# Altium PCB esp32WifiDeauther.PcbDoc
Units mm, origin at the board's own origin, x right, y up, seen from the top; angles counter-clockwise.
Board outline 65 x 38 mm, 2 copper layers (Top Layer, Bottom Layer); 14 components, 11 nets, 54 pads, 5 vias.
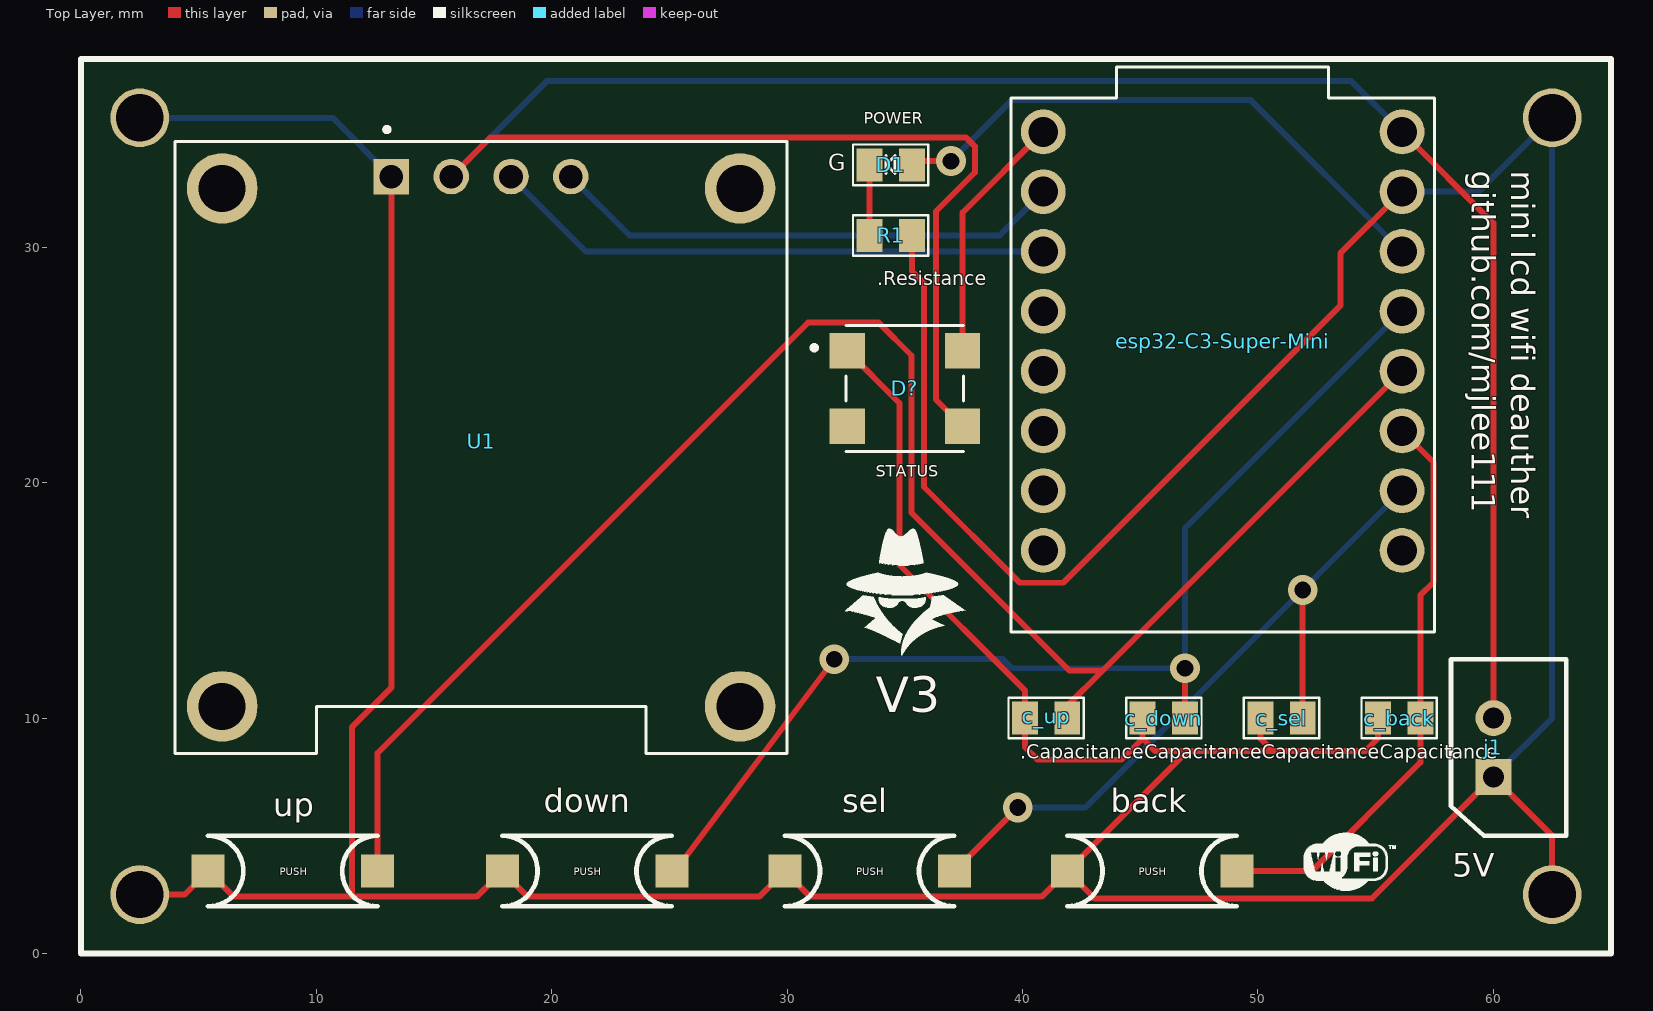
[diagram p0: Top Layer view]
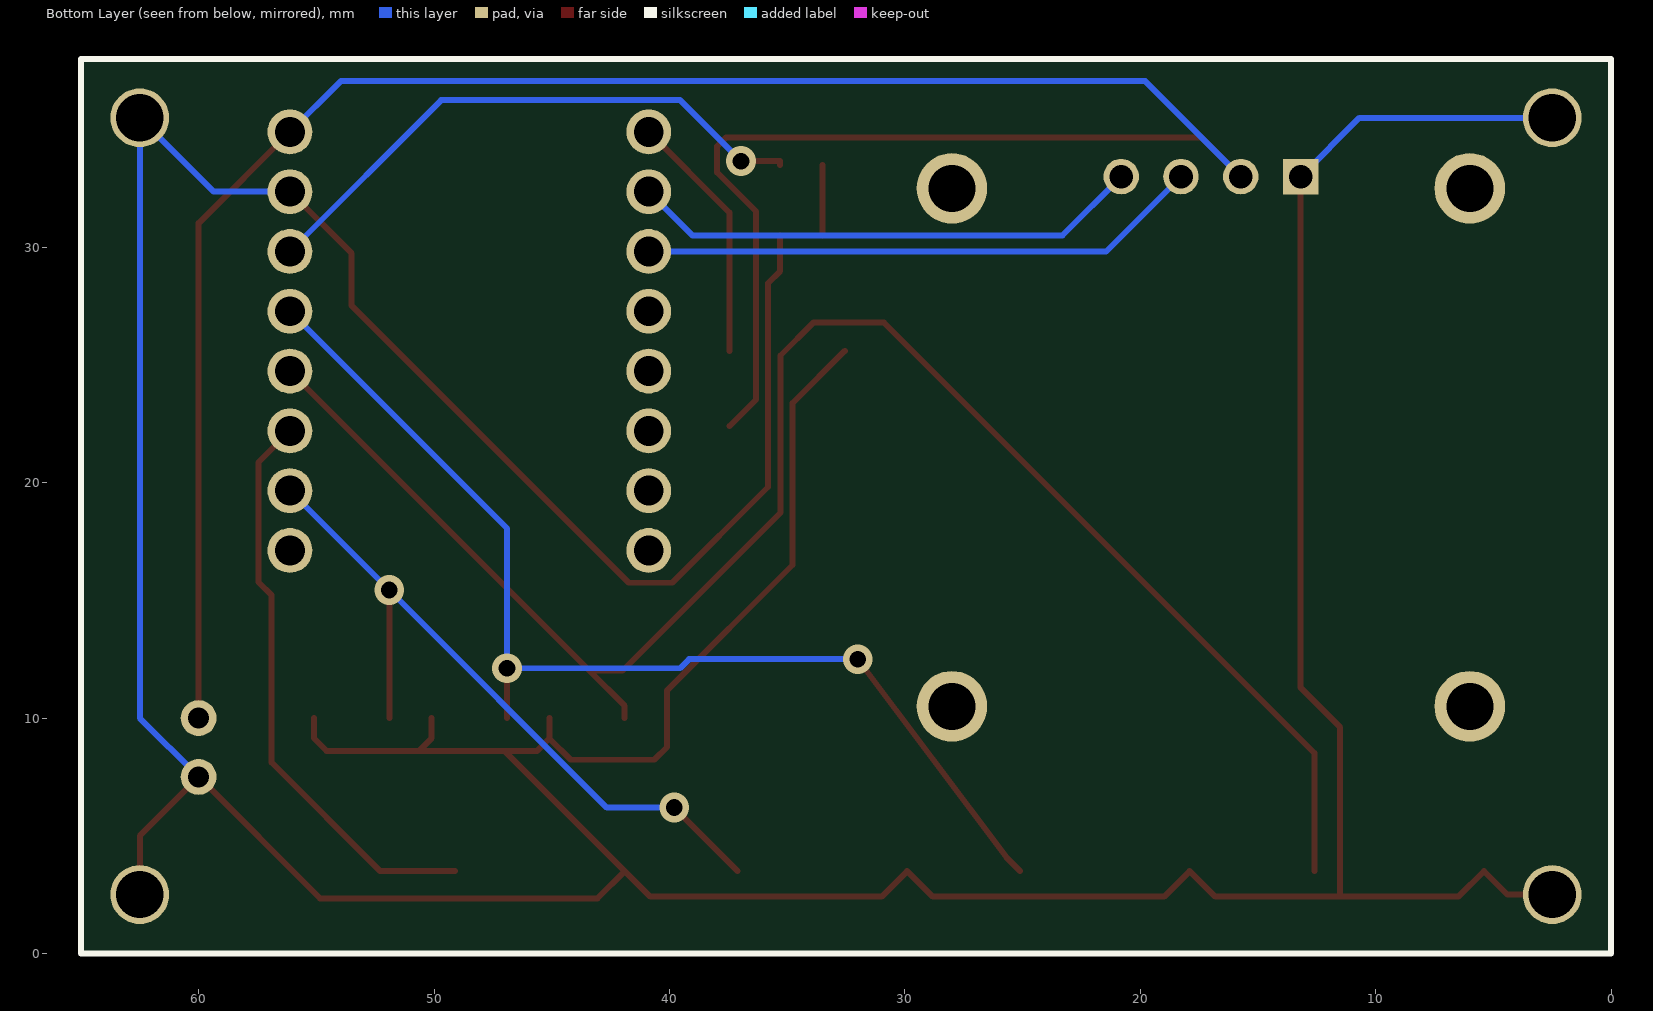
[diagram p1: Bottom Layer view, seen from below]
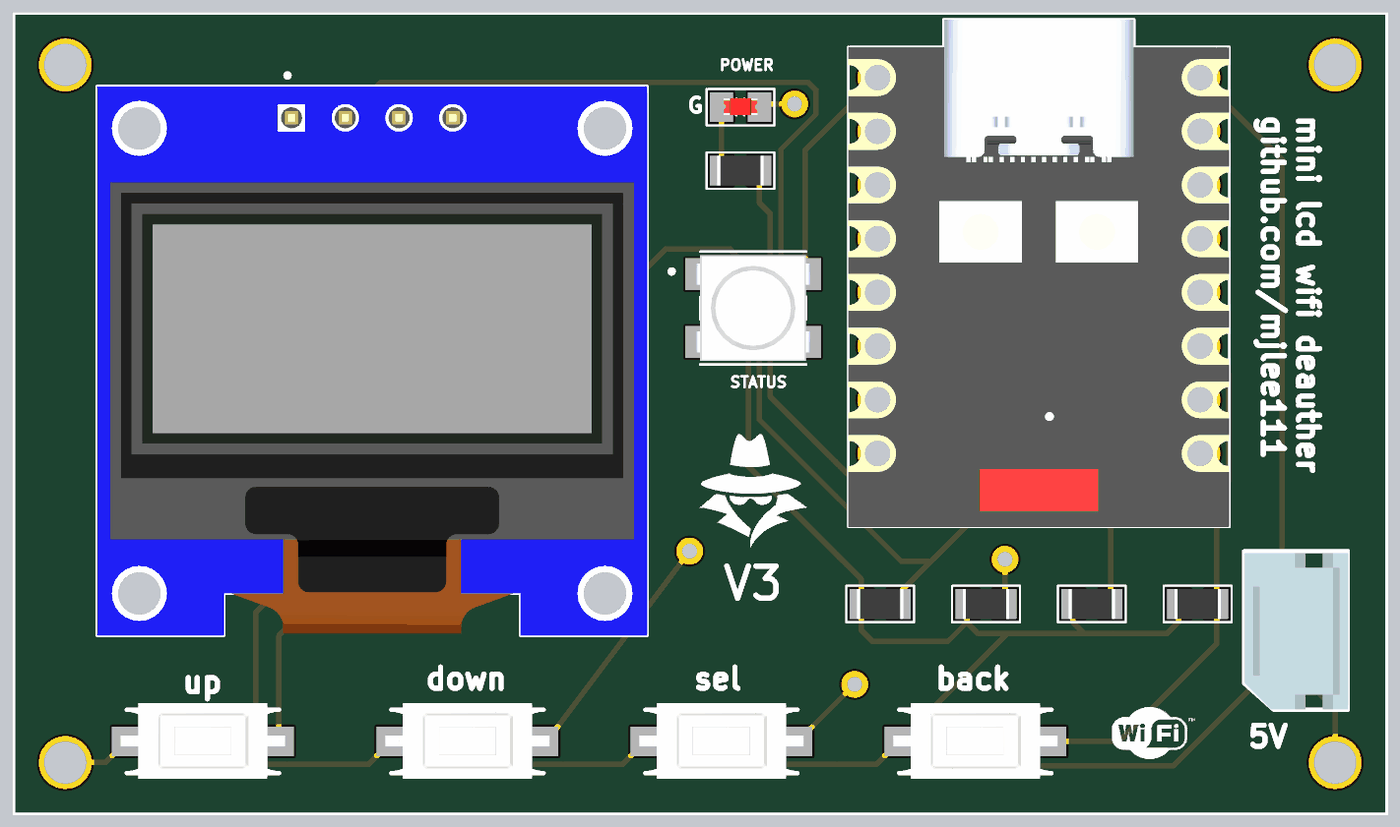
[diagram p2: 3D render of the assembled board from above, using the file's embedded part models]

## Layer stack, top to bottom
Top Solder: solder mask 0.0102, Solder Resist, Dk 3.5
Top Layer: signal copper 0.0356
Dielectric 1: dielectric 0.32, FR-4, Dk 4.8
Bottom Layer: signal copper 0.0356
Bottom Solder: solder mask 0.0102, Solder Resist, Dk 3.5

## Board outline
0,0 0,38 65,38 65,0

## Design rules (kind name [scope] priority, off if disabled: settings)
Clearance [All] p1: gap=0.254 ignorepadtopadclearanceinfootprint=FALSE
PolygonConnect [All] p1: connectstyle=Relief reliefconductorwidth=0.254 reliefentries=4 polygonreliefangle="90 Angle" airgapwidth=0.254
RoutingVias [All] p1: holewidth=0.711 width=1.27 viastyle="Through Hole" minholewidth=0.711 minwidth=1.27 maxholewidth=0.711 maxwidth=1.27
SolderMaskExpansion [All] p1: expansion=0.102 istentingtop=FALSE
SupplyNets "Schematic Supply Nets_9" [InNet('3.3V')] p1: voltage=0.000
SupplyNets "Schematic Supply Nets_8" [InNet('sk6812')] p2: voltage=0.000
SupplyNets "Schematic Supply Nets_7" [InNet('up')] p3: voltage=0.000
SupplyNets "Schematic Supply Nets_6" [InNet('SCL')] p4: voltage=0.000
SupplyNets "Schematic Supply Nets_5" [InNet('GND')] p5: voltage=0.000
SupplyNets "Schematic Supply Nets_4" [InNet('SDA')] p6: voltage=0.000
SupplyNets "Schematic Supply Nets_3" [InNet('5V')] p7: voltage=0.000
SupplyNets "Schematic Supply Nets_2" [InNet('back')] p8: voltage=0.000
SupplyNets "Schematic Supply Nets_1" [InNet('sel')] p9: voltage=0.000
SupplyNets "Schematic Supply Nets" [InNet('down')] p10: voltage=0.000
Width [All] p1: maxlimit=0.254 minlimit=0.254 preferedwidth=0.254
30 further rules are at their usual default settings.

## Components (designator, comment, footprint, x,y, rotation, side; value= is the part's Value field where it differs from the comment)
back "switch_tact" SMD_PUSH_SW 45.5,3.5 r0 top
c_back "non-polar_Capacitor" SMD_Capacitor 56,10 r0 top
c_down "non-polar_Capacitor" SMD_Capacitor 46,10 r0 top
c_sel "non-polar_Capacitor" SMD_Capacitor 51,10 r0 top
c_up "non-polar_Capacitor" SMD_Capacitor 41,10 r0 top
D1 "LED" SMD_LED 34.4,33.5 r0 top
D? "SK6812" LED_SK6812 35,24 r0 top
down "switch_tact" SMD_PUSH_SW 21.5,3.5 r0 top
esp32-C3-Super-Mini "ESP32-C3_SUPERMINI" MODULE_ESP32-C3_SUPERMINI 48.5,25 r0 top
j1 "Molex_2Pin" MOLEX_2PIN 60,10 r90 top
R1 "Resistor" SMD_Resistor 34.4,30.5 r0 top
sel "switch_tact" SMD_PUSH_SW 33.5,3.5 r0 top
U1 "DM-OLED096-636" MODULE_DM-OLED096-636 17,21.5 r0 top
up "switch_tact" SMD_PUSH_SW 9,3.5 r0 top

## Footprints (in the part's own frame and the unit in brackets; to place one, negate y for a bottom-side part, rotate by r counter-clockwise, add the part's x,y. Pads: shape width x height; smd on the part's side, far side on the other; paste and mask are expansions set on the pad)
LED_SK6812 [mm]
  rect 1.5x1.5 smd: 1(-2.45,1.6) 2(-2.45,-1.6) 3(2.45,-1.6) 4(2.45,1.6)
  silkscreen extent -3.95,-2.67 2.5,2.67, body extent -2.7,-2.5 2.7,2.5, height 1.6
MODULE_DM-OLED096-636 [mm]
  rect 1.508x1.508 / inner round 1.508 / far side rect 1.508x1.508 hole 1: 1(-3.81,11.5)
  round 1.508 hole 1: 2(-1.27,11.5) 3(1.27,11.5) 4(3.81,11.5)
  round 3 hole 2: S1(-11,11) S2(11,11) S3(11,-11) S4(-11,-11)
  silkscreen extent -13,-13 13,13.6, body extent -13,-13 13,13, height 5.66
MODULE_ESP32-C3_SUPERMINI [mm]
  round 1.905 hole 1.27: 0(7.62,-7.88) 1(7.62,-5.34) 2(7.62,-2.8) 3(7.62,-0.26) 3.3(7.62,4.82) 4(7.62,2.28) 5(-7.62,9.9) 5V(7.62,9.9) 6(-7.62,7.36) 7(-7.62,4.82) 8(-7.62,2.28) 9(-7.62,-0.26) 10(-7.62,-2.8) 20(-7.62,-5.34) 21(-7.62,-7.88) G(7.62,7.36)
  silkscreen extent -9,-11.35 9,12.65, body extent -9,-11.35 9,12.65, height 4.16
MOLEX_2PIN [mil]
  rect 60x60 / inner round 60 / far side round 60 hole 35: 1(-98.42,0)
  round 60 hole 35: 2(0,0)
  silkscreen extent -197,-122 98,71, body extent -196,-123 95,70, height 233
SMD_Capacitor [mm] "Chip Capacitor, 2-Leads, Body 2.00x1.25mm, IPC Medium Density"
  rect 1.1x1.4 smd: 1(-0.9,0) 2(0.9,0)
  silkscreen extent -1.6,-0.86 1.6,0.86, body extent -1.1,-0.7 1.1,0.7, height 0.65
SMD_LED [mm] "Chip Light Emitting Diode, 2-Leads, Body 1.60x0.80mm, IPC Medium Density"
  rect 1.1x1.4 smd: 1(-0.9,0) 2(0.9,0)
  silkscreen extent -1.6,-0.86 1.6,0.86, body extent -0.8,-0.38 0.8,0.42, height 0.81
SMD_PUSH_SW [mm]
  rect 1.4x1.4 smd: 1(-3.6,0) 2(3.6,0)
  silkscreen extent -3.6,-1.5 3.6,1.5, body extent -3.9,-1.78 3.9,1.82, height 2.46
SMD_Resistor [mm] "Chip Resistor, 2-Leads, Body 2.00x1.25mm, IPC Medium Density"
  rect 1.1x1.4 smd: 1(-0.9,0) 2(0.9,0)
  silkscreen extent -1.6,-0.86 1.6,0.86, body extent -1.1,-0.7 1.1,0.7, height 0.65

## Part data
back down sel up: library part CMP-030-000003-1, "micro tact switch", Design Item ID=switch_tact, Source=robit_switch.SchLib
c_back c_down c_sel c_up: library part CMP-024-000020-2, "SMD type ceramic capacitor", Capacitance=0.1µF, Design Item ID=Capacitor, Source=robit_passive.SchLib
D1: library part CMP-026-000008-1, "Light Emitting Diode", Color=RED, Design Item ID=LED, Source=robit_passive.SchLib
D?: library part CMP-026-000014-1, "SMD 5050 Full color RGB LED data transmission frequency up to 800Kbps, with 30 fps refresh rate, 5.00x5.00 mm", Package="SMD-4 Shenzhen LED Color Optoelectronic Inc.", Availability=Unavailable, Check_prices=https://www.snapeda.com/parts/SK6812/Shenzhen%20LED%20Color%20Optoelectronic%20Inc./view-part/554016/?ref=eda, Component Type=Standard, Design Item ID=SK6812, MF="Shenzhen LED Color Optoelectronic Inc.", MP=SK6812, Pin Count=4, Price=None, SnapEDA_Link=https://www.snapeda.com/parts/SK6812/Shenzhen%20LED%20Color%20Optoelectronic%20Inc./view-part/554016/?ref=snap, Source=SK6812.SchLib
esp32-C3-Super-Mini: library part CMP-021-000014-1, "Super tiny ESP32-C3 board", Package=Package, Check_prices=https://www.snapeda.com/parts/ESP32-C3%20SuperMini/Espressif+Systems/view-part/?ref=eda, Component Type=Standard, Design Item ID=ESP32-C3_SUPERMINI, MF="Espressif Systems", MP="ESP32-C3 SuperMini", Pin Count=16, SnapEDA_Link=https://www.snapeda.com/parts/ESP32-C3%20SuperMini/Espressif+Systems/view-part/?ref=snap, Source=ESP32-C3_SUPERMINI.SchLib
j1: library part CMP-019-000043-1, "Molex 2Pin Connector", Design Item ID=Molex_2Pin, Source=robit_connector.SchLib
R1: library part CMP-029-000004-2, "SMD type resistor", Resistance=180, Design Item ID=Resistor, Source=robit_passive.SchLib
U1: library part CMP-076-000001-1, "0.96??128 X 64 MONOCHROME GRAPHIC OLED DISPLAY MODULE - I2C", Package=Package, Check_prices=https://www.snapeda.com/parts/DM-OLED096-636/Display+Module/view-part/?ref=eda, Component Type=Standard, Design Item ID=DM-OLED096-636, MF="Display Module", MP=DM-OLED096-636, Pin Count=4, SnapEDA_Link=https://www.snapeda.com/parts/DM-OLED096-636/Display+Module/view-part/?ref=snap, Source=DM-OLED096-636.SchLib

## Free pads (board coordinates)
  round 2.5 hole 2: GND(2.5,2.5) GND(2.5,35.5) GND(62.5,2.5) GND(62.5,35.5)

## Via types
v1: diameter 1.27, hole 0.711, Top Layer to Bottom Layer, 5 vias

## Nets (pads, with @x,y where several pads share a name; then routed paths per layer and width w, separated by ;. In a path a pad name is that pad's centre, name@x,y a point inside that pad or via, vN(x,y) a via of type N, cw(c..) or ccw(c..) an arc to the next point about the centre after c; other vN are vias at no path point)
3.3V: D1.2 esp32-C3-Super-Mini.3.3 | length 24.7
  Top Layer w0.254: D1.2 35.3,33.655 v1(36.957,33.655)
  Bottom Layer w0.254: v1(36.957,33.655) 39.548,36.246 49.694,36.246 esp32-C3-Super-Mini.3.3
5V: D?.3 esp32-C3-Super-Mini.5V j1.2 U1.2 | length 105.6
  Top Layer w0.254: U1.2 17.401,34.671 37.592,34.671 37.973,34.29 37.973,33.172 36.319,31.518 36.319,23.531 D?.3 ; esp32-C3-Super-Mini.5V 60,31.02 j1.2
  Bottom Layer w0.254: U1.2 19.789,37.059 53.961,37.059 esp32-C3-Super-Mini.5V
back: back.2 c_back.2 esp32-C3-Super-Mini.2 | length 24.6
  Top Layer w0.254: back.2 52.289,3.5 56.9,8.111 c_back.2 56.9,15.219 57.455,15.773 57.455,20.865 esp32-C3-Super-Mini.2
down: c_down.2 down.2 esp32-C3-Super-Mini.4 | length 47.5
  Top Layer w0.254: down.2 25.673,4.073 v1(32,12.5) ; c_down.2 v1(46.9,12.116)
  Bottom Layer w0.254: v1(32,12.5) 39.161,12.5 39.545,12.116 v1(46.9,12.116) 46.9,18.06 esp32-C3-Super-Mini.4
GND: back.1 c_back.1 c_down.1 c_sel.1 c_up.1 D?.1 down.1 esp32-C3-Super-Mini.G j1.1 pad.GND R1.2 sel.1 U1.1 up.1 | length 236.6
  Top Layer w0.254: pad.GND@2.5,2.5 4.4,2.5 up.1 6.487,2.413 11.506,2.413 ; U1.1 13.19,11.29 11.506,9.606 11.506,2.413 ; D?.1 34.773,23.377 34.773,16.503 40.1,11.176 c_up.1 40.1,8.77 40.64,8.23 44.196,8.23 45.1,9.134 ; R1.2 35.3,28.981 35.811,28.47 35.811,19.815 39.878,15.748 41.733,15.748 53.5,27.516 53.5,29.74 esp32-C3-Super-Mini.G ; c_down.1 45.1,9.134 ; c_sel.1 50.1,9.144 50.633,8.611 ; c_back.1 55.1,9.144 54.567,8.611 50.633,8.611 ; pad.GND@62.5,2.5 62.5,5 j1.1 54.837,2.337 43.063,2.337 back.1 ; 11.506,2.413 16.813,2.413 down.1 18.987,2.413 28.813,2.413 sel.1 30.987,2.413 40.813,2.413 back.1 ; back.1 47.011,8.611 ; 45.1,9.134 45.623,8.611 47.011,8.611 ; 47.011,8.611 50.633,8.611
  Bottom Layer w0.254: pad.GND@2.5,35.5 10.69,35.5 U1.1 ; esp32-C3-Super-Mini.G 59.36,32.36 62.5,35.5 62.5,10 j1.1
NetD1_1: D1.1 R1.1 | length 3
  Top Layer w0.254: R1.1 D1.1
SCL: esp32-C3-Super-Mini.7 U1.3 | length 23.9
  Bottom Layer w0.254: U1.3 21.45,29.82 esp32-C3-Super-Mini.7
SDA: esp32-C3-Super-Mini.6 U1.4 | length 21.9
  Bottom Layer w0.254: U1.4 23.305,30.505 39.025,30.505 esp32-C3-Super-Mini.6
sel: c_sel.2 esp32-C3-Super-Mini.1 sel.2 | length 31.2
  Top Layer w0.254: sel.2 v1(39.798,6.198) ; c_sel.2 v1(51.9,15.44)
  Bottom Layer w0.254: v1(39.798,6.198) 42.658,6.198 v1(51.9,15.44) esp32-C3-Super-Mini.1
sk6812: D?.4 esp32-C3-Super-Mini.5 | length 10.7
  Top Layer w0.254: D?.4 37.45,31.47 esp32-C3-Super-Mini.5
up: c_up.2 esp32-C3-Super-Mini.3 up.2 | length 74
  Top Layer w0.254: up.2 12.6,8.511 30.886,26.797 33.884,26.797 35.281,25.4 35.281,18.726 41.986,12.02 43.4,12.02 ; c_up.2 41.9,10.52 43.4,12.02 ; esp32-C3-Super-Mini.3 43.4,12.02
pads on no net: D?.2 esp32-C3-Super-Mini.0 esp32-C3-Super-Mini.8 esp32-C3-Super-Mini.9 esp32-C3-Super-Mini.10 esp32-C3-Super-Mini.20 esp32-C3-Super-Mini.21 U1.S1 U1.S2 U1.S3 U1.S4

## Silkscreen, mask and mechanical layers (free items; w line width, h text height)
Top Overlay:
  drawing of 15 lines, arcs and shapes, not listed
  text "POWER" at 33.254,35.254 h0.5
  text "G" at 31.754,33.254 h0.7
  text "github.com/mjlee111" at 59.087,33.246 h1 r270
  text "mini lcd wifi deauther" at 60.754,33.246 h1 r270
  text "STATUS" at 33.754,20.254 h0.5
  text "V3" at 33.765,10.254 h1.52
  text "5V" at 58.254,3.254 h1
Bottom Overlay:
  the board outline again, w0.254

## Text inside footprints (layer, text, board x,y; h text height)
back: Top Overlay "PUSH" at 44.941,3.322 h0.32
down: Top Overlay "PUSH" at 20.941,3.322 h0.32
sel: Top Overlay "PUSH" at 32.941,3.322 h0.32
up: Top Overlay "PUSH" at 8.441,3.322 h0.32